# Allegro board RK_NVR_DEMO_RK3568_DDR4P216SD4_V12_20201221YWQ_final.brd
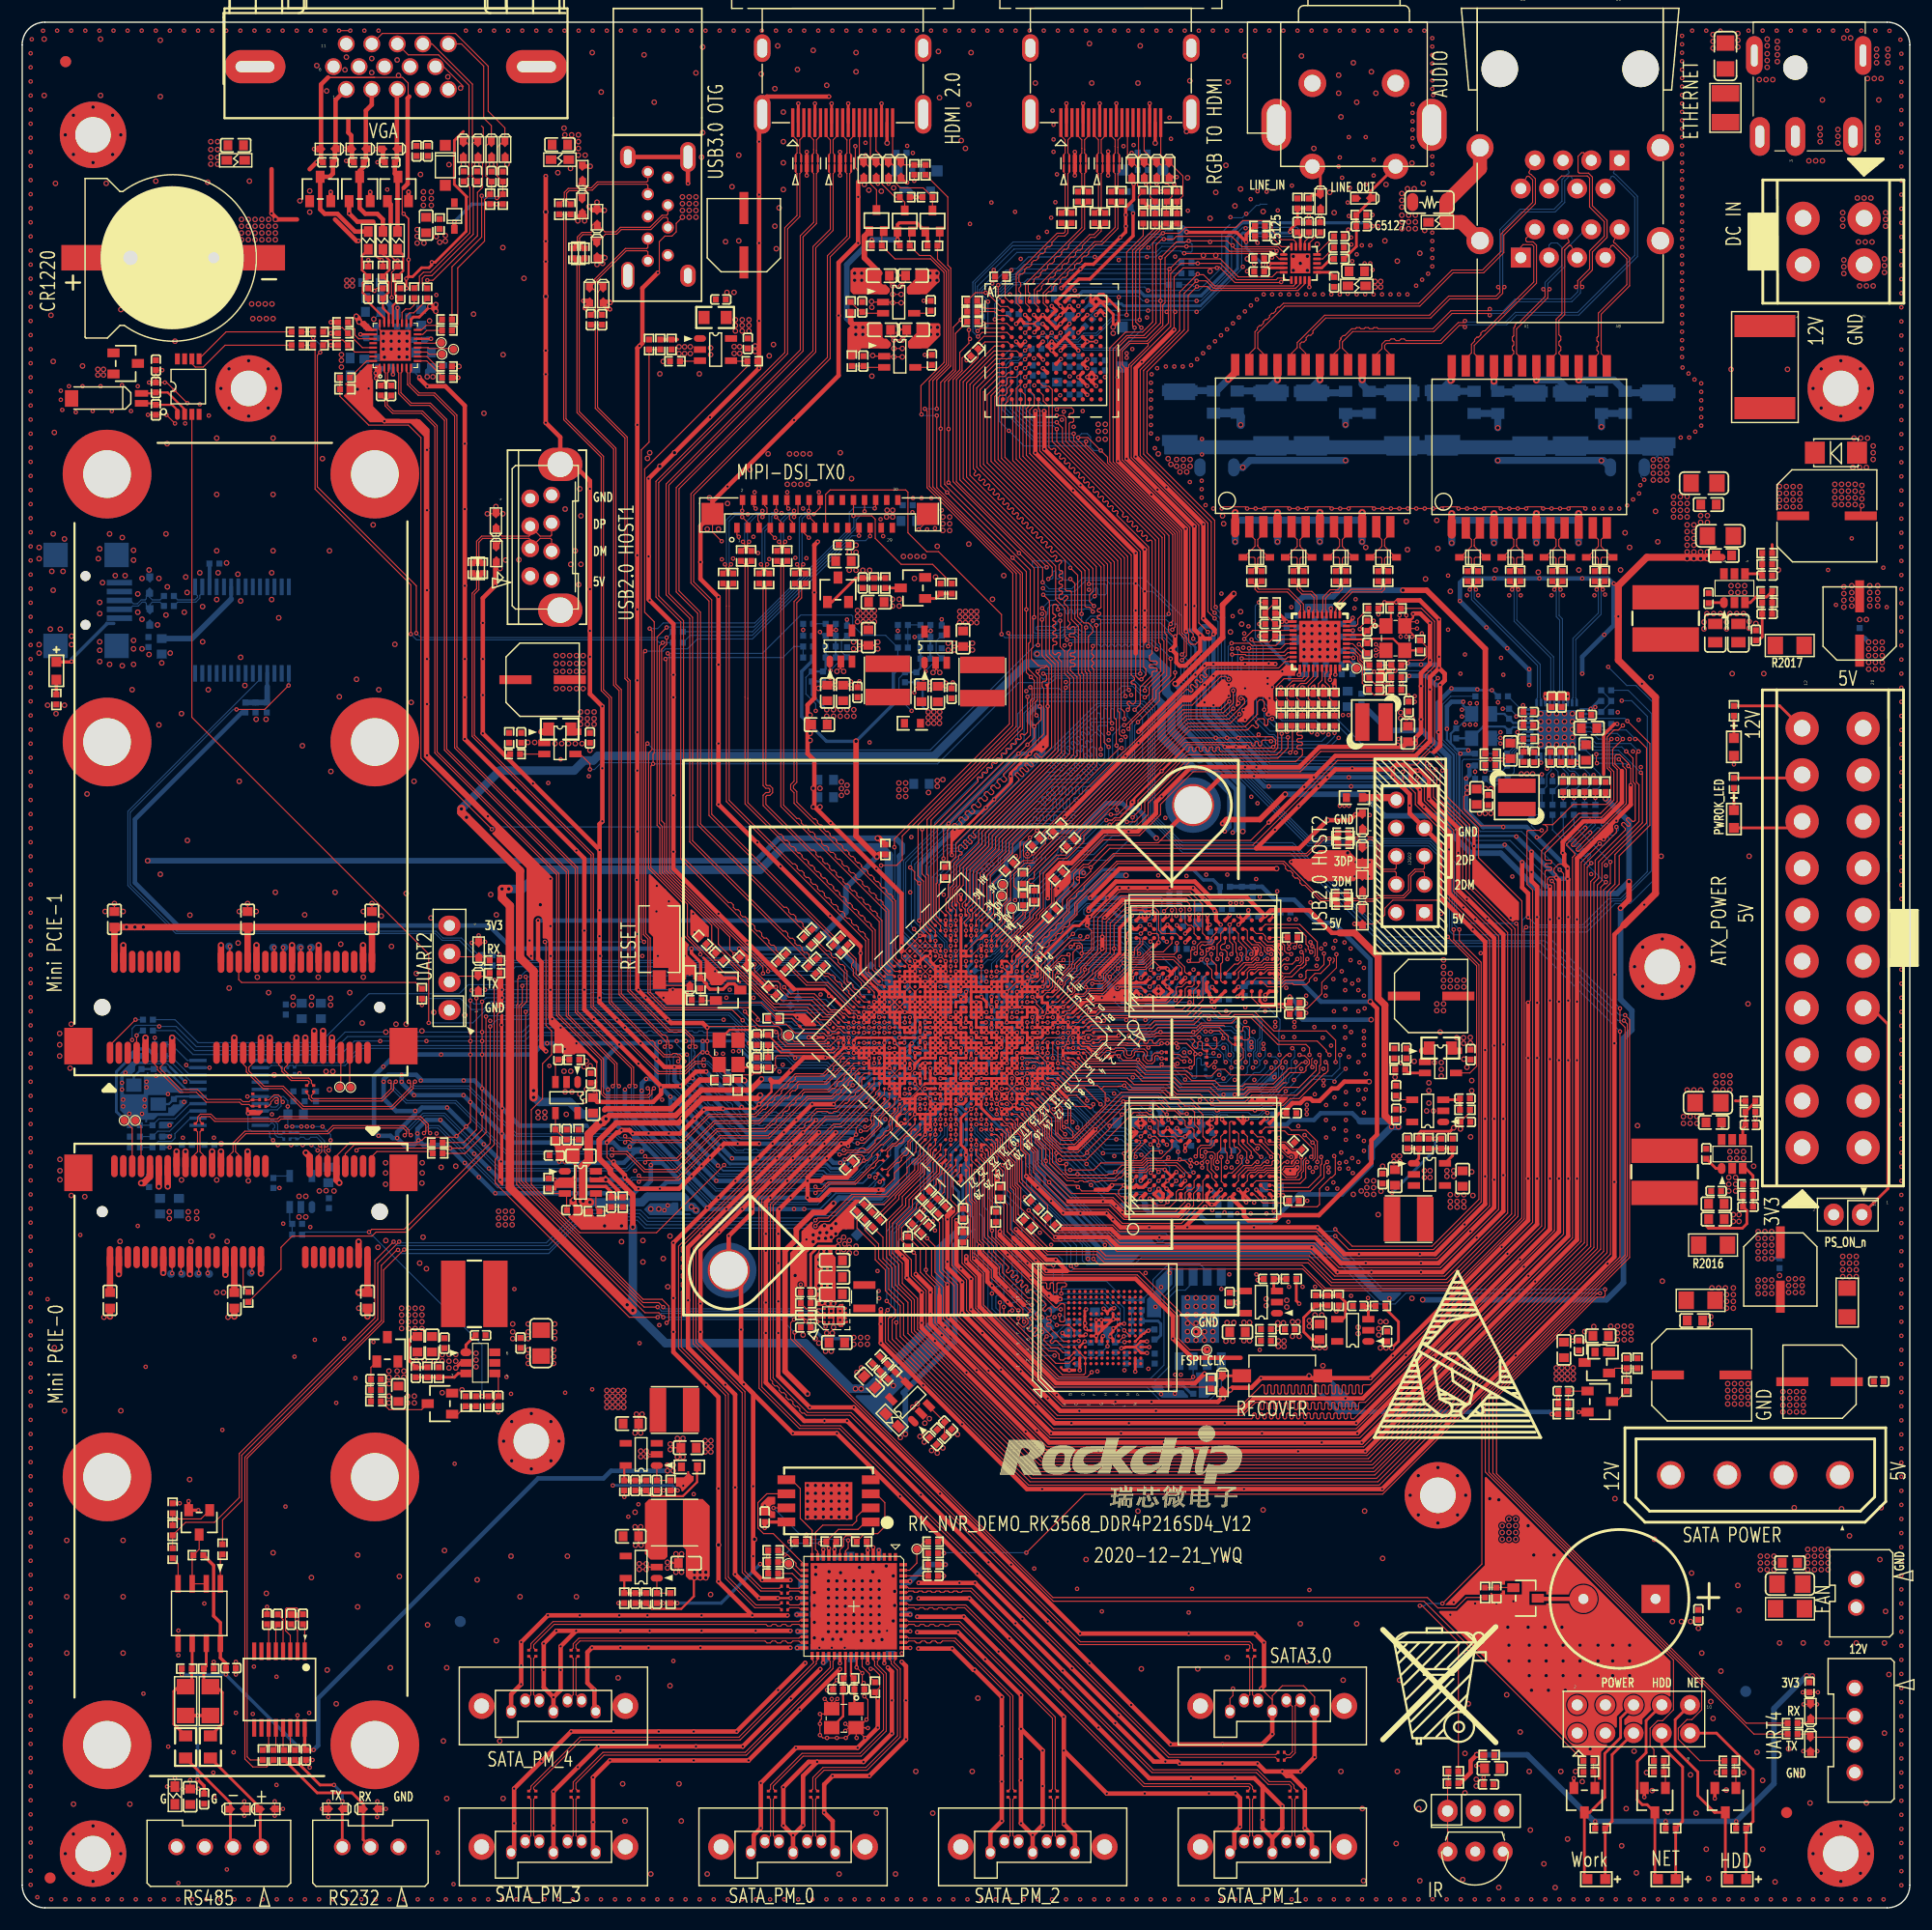
[diagram p0: board, top side]
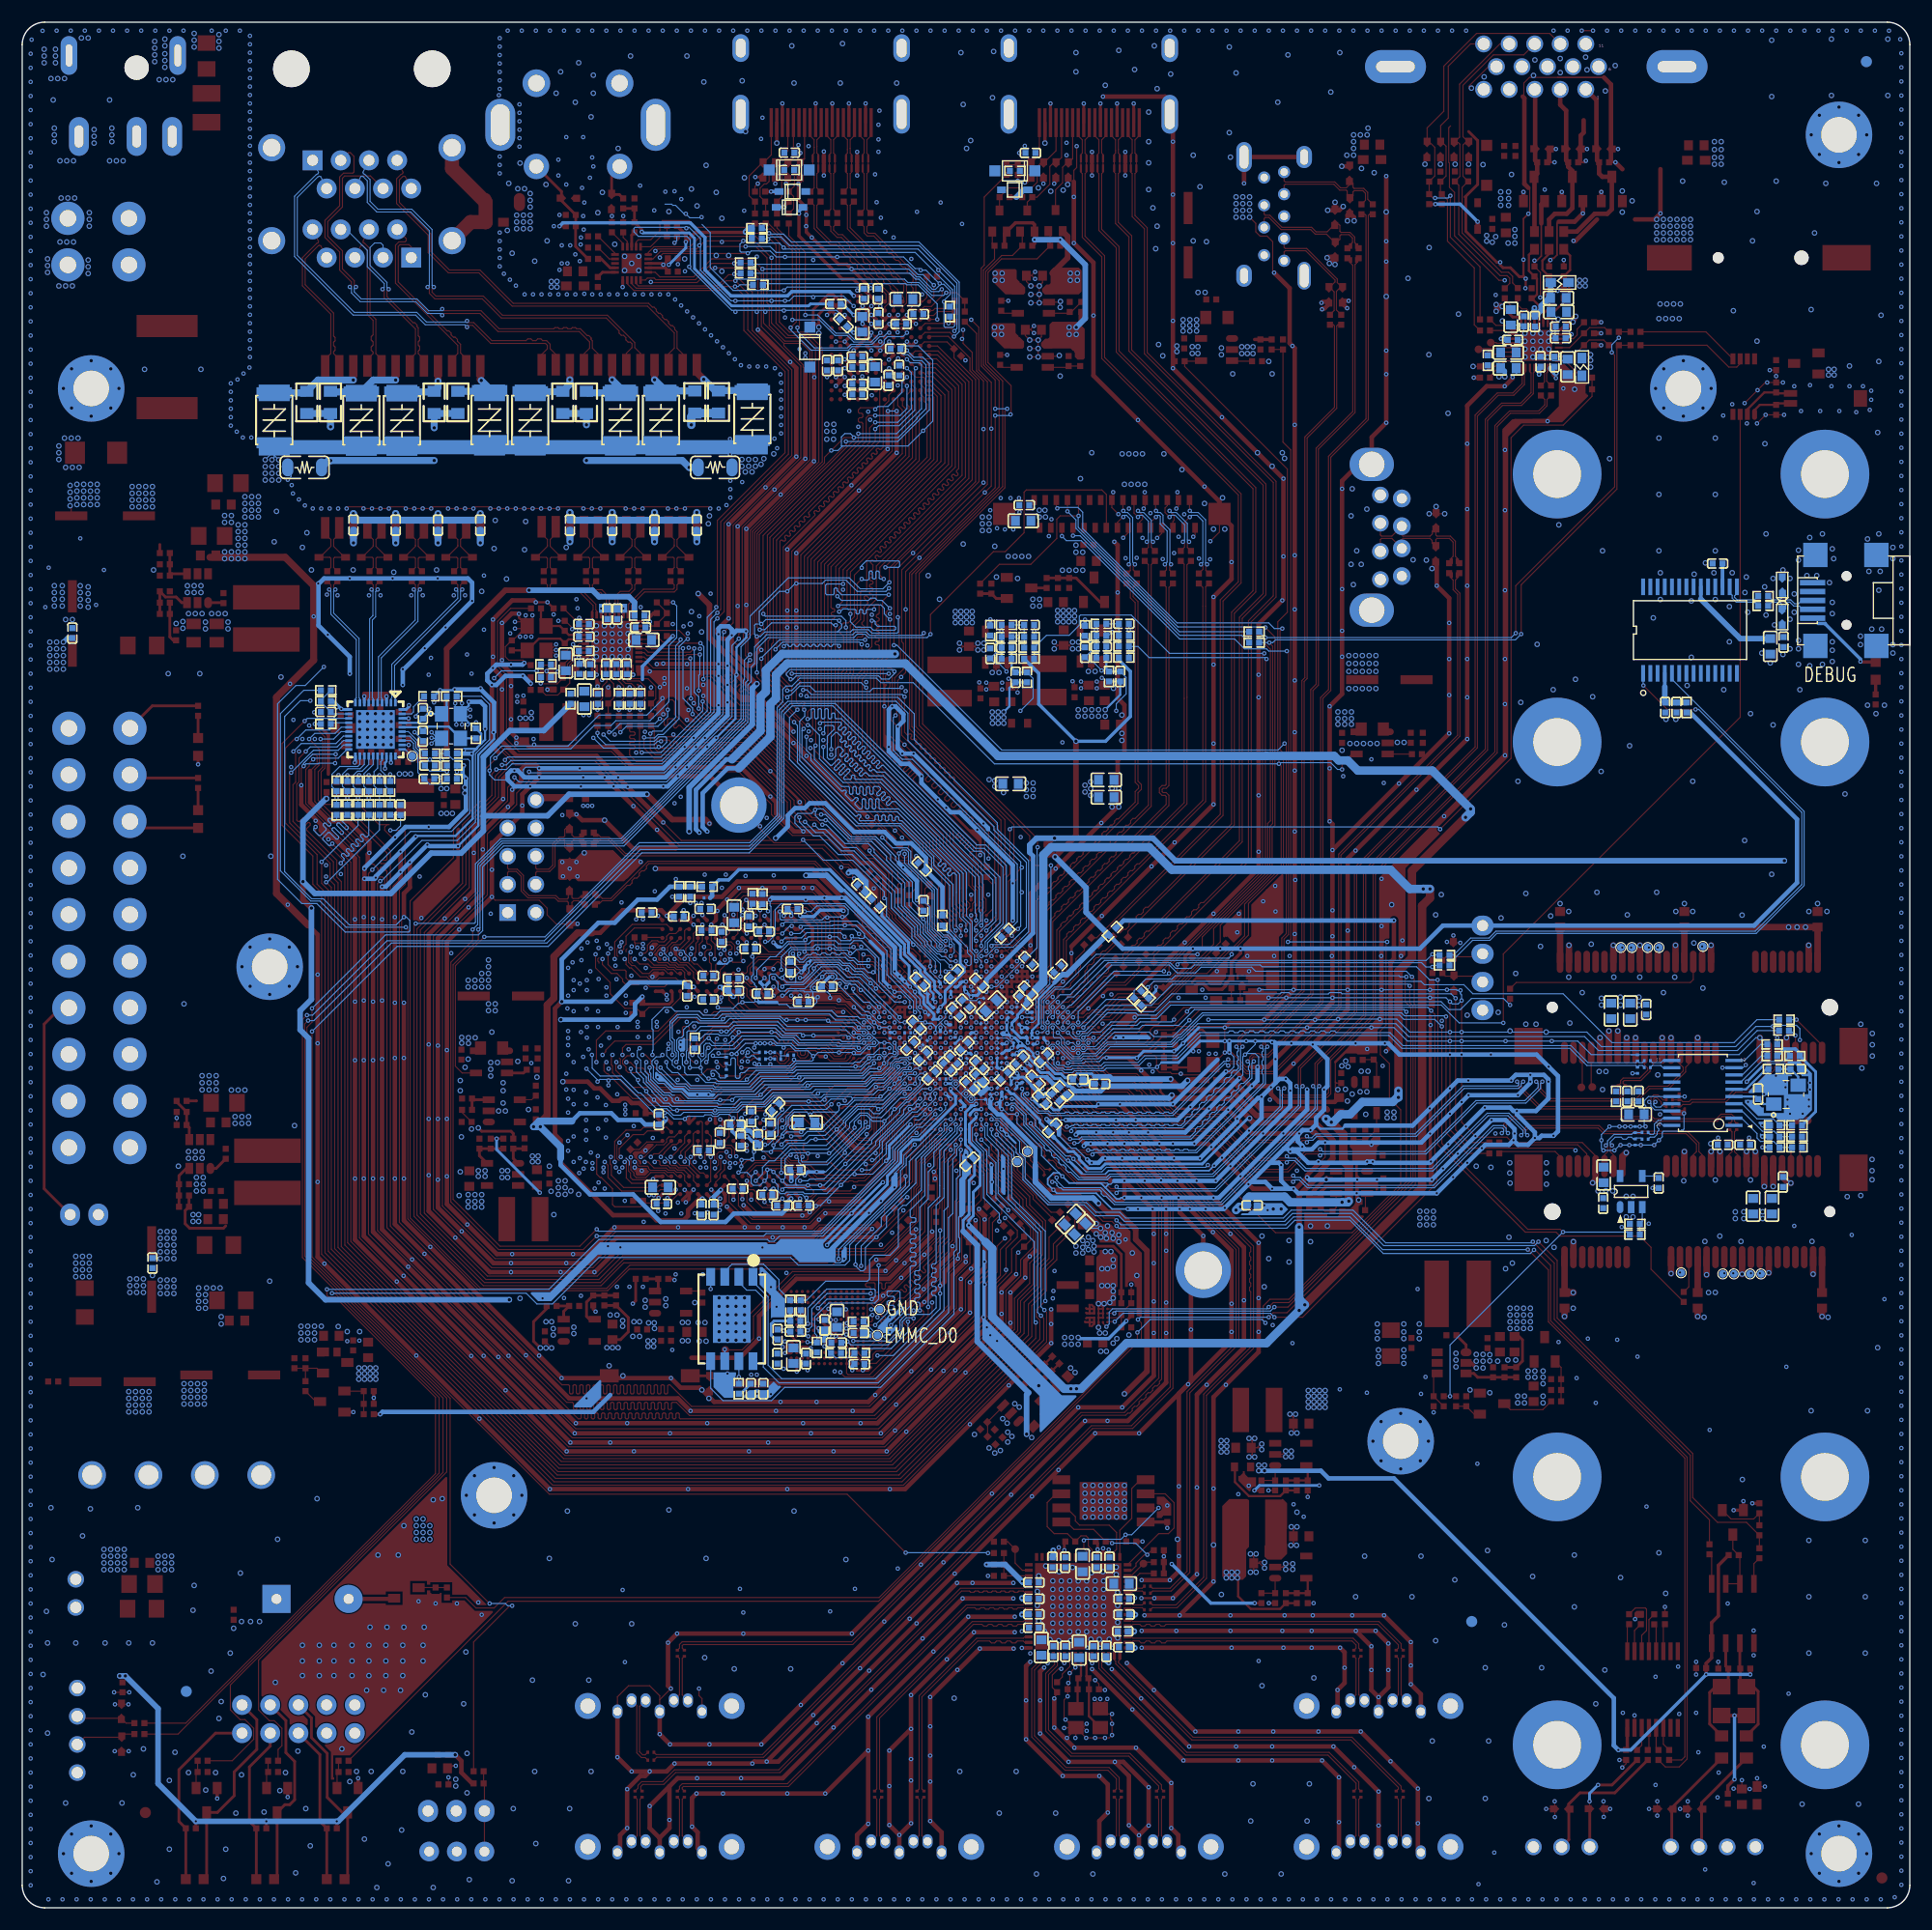
[diagram p1: board, bottom side, seen from below]

Outline 170.08 x 169.98 mm; copper layers: TOP, GND, POWER, BOTTOM. Coordinates in mm from the lower left corner of the outline.
Outline path: 0,167.94 0,2.03 arc(0.6,0.6) 2.03,0 168.05,0 arc(169.48,0.6) 170.08,2.03 170.08,167.94 arc(169.48,169.38) 168.05,169.98 2.03,169.98 arc(0.6,169.38) 0,167.94

## Design rules (mm)
net group CLK0N: nets CLK0N CLK_0N
net group CLK0P: nets CLK0P CLK_0P
net group CLK1N: nets CLK1N CLK_1N
net group CLK1P: nets CLK1P CLK_1P
net group CLK3: nets CLK3N CLK3P
net group DDR4_BG1: nets DDR4_BG1 DDR4_BG1/VSS
net group DEBUG0_USBDM: nets DEBUG0_USB_DM DEBUG0_USBDM
net group DEBUG0_USBDP: nets DEBUG0_USB_DP DEBUG0_USBDP
net group DP9: nets PCIE30_REFCLKN_IN PCIE30_REFCLKP_IN
net group DP_TX_AUX: nets DP_TX_AUXN DP_TX_AUXP
net group EDP_TX_AUX: nets EDP_TX_AUXN EDP_TX_AUXP
net group EDP_TXD0N: nets EDP_TX_D0N EDP_TXD0N
net group EDP_TXD0P: nets EDP_TX_D0P EDP_TXD0P
net group EDP_TXD1N: nets EDP_TX_D1N EDP_TXD1N
net group EDP_TXD1P: nets EDP_TX_D1P EDP_TXD1P
net group EMMC_CLKOUT: nets EMMC_CLKOUT EMMC_CLKOUT_SOC
net group EMMC_DATA_STROBE: nets EMMC_DATA_STROBE EMMC_DATA_STROBE_SOC
net group EMMC_RSTN: nets EMMC_RSTN EMMC_RSTN/FSPI_D2
net group ETH0_REFCLKO_25M: nets ETH0_REFCLKO_25M GPIO2_C1
net group ETH1_REFCLKO_25M_M1: nets ETH1_REFCLKO_25M_M1 GPIO4_B3_D
net group GMAC0_RXCLK: nets GMAC0_RXCLK PHY0_RXCLK/PHYAD1
net group GMAC0_RXD0: nets GMAC0_RXD0 PHY0_RXD0/RXDLY
net group GMAC0_RXD1: nets GMAC0_RXD1 PHY0_RXD1/TXDLY
net group GMAC0_RXD2: nets GMAC0_RXD2 PHY0_RXD2/PLLOFF
net group GMAC0_RXD3: nets GMAC0_RXD3 PHY0_RXD3/PHYAD0
net group GMAC0_RXDV_CRS: nets GMAC0_RXDV_CRS PHY0_RXDV/PHYAD2
net group GMAC0_TXCLK: nets GMAC0_TXCLK GPIO2_B0
net group GMAC0_TXD0: nets GMAC0_TXD0 GPIO2_B3
net group GMAC0_TXD1: nets GMAC0_TXD1 GPIO2_B4
net group GMAC0_TXD2: nets GMAC0_TXD2 GPIO2_A6
net group GMAC0_TXD3: nets GMAC0_TXD3 GPIO2_A7
net group GMAC0_TXEN: nets GMAC0_TXEN GPIO2_B5
net group GMAC1_RXCLK_M1: nets GMAC1_RXCLK_M1 PHY1_RXCLK/PHYAD1
net group GMAC1_RXD0_M1: nets GMAC1_RXD0_M1 PHY1_RXD0/RXDLY
net group GMAC1_RXD1_M1: nets GMAC1_RXD1_M1 PHY1_RXD1/TXDLY
net group GMAC1_RXD2_M1: nets GMAC1_RXD2_M1 PHY1_RXD2/PLLOFF
net group GMAC1_RXD3_M1: nets GMAC1_RXD3_M1 PHY1_RXD3/PHYAD0
net group GMAC1_RXDV_CRS_M1: nets GMAC1_RXDV_CRS_M1 PHY1_RXDV/PHYAD2
net group GMAC1_TXCLK_M1: nets GMAC1_TXCLK_M1 GPIO4_A0_D
net group GMAC1_TXD0_M1: nets GMAC1_TXD0_M1 GPIO4_A4_D
net group GMAC1_TXD1_M1: nets GMAC1_TXD1_M1 GPIO4_A5_D
net group GMAC1_TXD2_M1: nets GMAC1_TXD2_M1 GPIO3_D6_D
net group GMAC1_TXD3_M1: nets GMAC1_TXD3_M1 GPIO3_D7_D
net group GMAC1_TXEN_M1: nets GMAC1_TXEN_M1 GPIO4_A6_D
net group HDMI14_TX0N: nets HDMI14_TX0N HDMI14_TX0N_PORT
net group HDMI14_TX0P: nets HDMI14_TX0P HDMI14_TX0P_PORT
net group HDMI14_TX1N: nets HDMI14_TX1N HDMI14_TX1N_PORT
net group HDMI14_TX1P: nets HDMI14_TX1P HDMI14_TX1P_PORT
net group HDMI14_TX2N: nets HDMI14_TX2N HDMI14_TX2N_PORT
net group HDMI14_TX2P: nets HDMI14_TX2P HDMI14_TX2P_PORT
net group HDMI14_TXCLKN: nets HDMI14_TXCLKN HDMI14_TXCLKN_PORT
net group HDMI14_TXCLKP: nets HDMI14_TXCLKP HDMI14_TXCLKP_PORT
net group HDMI_TX0N: nets HDMI_TX0N HDMI_TX0N_PORT
net group HDMI_TX0P: nets HDMI_TX0P HDMI_TX0P_PORT
net group HDMI_TX1N: nets HDMI_TX1N HDMI_TX1N_PORT
net group HDMI_TX1P: nets HDMI_TX1P HDMI_TX1P_PORT
net group HDMI_TX2N: nets HDMI_TX2N HDMI_TX2N_PORT
net group HDMI_TX2P: nets HDMI_TX2P HDMI_TX2P_PORT
net group HDMI_TXCLKN: nets HDMI_TXCLKN HDMI_TXCLKN_PORT
net group HDMI_TXCLKP: nets HDMI_TXCLKP HDMI_TXCLKP_PORT
net group LAN0_A: nets LAN0_A+ LAN0_A-
net group LAN0_B: nets LAN0_B+ LAN0_B-
net group LAN0_C: nets LAN0_C+ LAN0_C-
net group LAN0_D: nets LAN0_D+ LAN0_D-
net group LAN1_A: nets LAN1_A+ LAN1_A-
net group LAN1_B: nets LAN1_B+ LAN1_B-
net group LAN1_C: nets LAN1_C+ LAN1_C-
net group LAN1_D: nets LAN1_D+ LAN1_D-
net group LCDC_CLK: nets LCDC_CLK LCDC_CLK_SOC
net group MIPI_DSI_TX0_CLKN: nets MIPI_DSI_TX0_CLKN MIPI_DSI_TX0_CLKN/LVDS_TX0_CLKN
net group MIPI_DSI_TX0_CLKP: nets MIPI_DSI_TX0_CLKP MIPI_DSI_TX0_CLKP/LVDS_TX0_CLKP
net group MIPI_DSI_TX0_D0N: nets MIPI_DSI_TX0_D0N MIPI_DSI_TX0_D0N/LVDS_TX0_D0N
net group MIPI_DSI_TX0_D0P: nets MIPI_DSI_TX0_D0P MIPI_DSI_TX0_D0P/LVDS_TX0_D0P
net group MIPI_DSI_TX0_D1N: nets MIPI_DSI_TX0_D1N MIPI_DSI_TX0_D1N/LVDS_TX0_D1N
net group MIPI_DSI_TX0_D1P: nets MIPI_DSI_TX0_D1P MIPI_DSI_TX0_D1P/LVDS_TX0_D1P
net group MIPI_DSI_TX0_D2N: nets MIPI_DSI_TX0_D2N MIPI_DSI_TX0_D2N/LVDS_TX0_D2N
net group MIPI_DSI_TX0_D2P: nets MIPI_DSI_TX0_D2P MIPI_DSI_TX0_D2P/LVDS_TX0_D2P
net group MIPI_DSI_TX0_D3N: nets MIPI_DSI_TX0_D3N MIPI_DSI_TX0_D3N/LVDS_TX0_D3N
net group MIPI_DSI_TX0_D3P: nets MIPI_DSI_TX0_D3P MIPI_DSI_TX0_D3P/LVDS_TX0_D3P
net group PCIE30_RX0: nets PCIE30_RX0N PCIE30_RX0P
net group PCIE30_RX1: nets PCIE30_RX1N PCIE30_RX1P
net group PCIE30_TX0N: nets PCIE30_TX0_N PCIE30_TX0N
net group PCIE30_TX0P: nets PCIE30_TX0_P PCIE30_TX0P
net group PCIE30_TX1N: nets PCIE30_TX1_N PCIE30_TX1N
net group PCIE30_TX1P: nets PCIE30_TX1_P PCIE30_TX1P
net group PHY0_MDI0: nets PHY0_MDI0+ PHY0_MDI0-
net group PHY0_MDI1: nets PHY0_MDI1+ PHY0_MDI1-
net group PHY0_MDI2: nets PHY0_MDI2+ PHY0_MDI2-
net group PHY0_MDI3: nets PHY0_MDI3+ PHY0_MDI3-
net group PHY0_MDI_0: nets PHY0_MDI_0+ PHY0_MDI_0-
net group PHY0_MDI_1: nets PHY0_MDI_1+ PHY0_MDI_1-
net group PHY0_MDI_2: nets PHY0_MDI_2+ PHY0_MDI_2-
net group PHY0_MDI_3: nets PHY0_MDI_3+ PHY0_MDI_3-
net group PHY1_MDI0: nets PHY1_MDI0+ PHY1_MDI0-
net group PHY1_MDI1: nets PHY1_MDI1+ PHY1_MDI1-
net group PHY1_MDI2: nets PHY1_MDI2+ PHY1_MDI2-
net group PHY1_MDI3: nets PHY1_MDI3+ PHY1_MDI3-
net group PHY1_MDI_0: nets PHY1_MDI_0+ PHY1_MDI_0-
net group PHY1_MDI_1: nets PHY1_MDI_1+ PHY1_MDI_1-
net group PHY1_MDI_2: nets PHY1_MDI_2+ PHY1_MDI_2-
net group PHY1_MDI_3: nets PHY1_MDI_3+ PHY1_MDI_3-
net group SATA1RXN: nets SATA1_RXN SATA1RXN
net group SATA1RXP: nets SATA1_RXP SATA1RXP
net group SATA1TXN: nets SATA1_TXN SATA1TXN
net group SATA1TXP: nets SATA1_TXP SATA1TXP
net group SATA2_RXN: nets SATA2_RXN SATAPM_TXN5
net group SATA2_RXP: nets SATA2_RXP SATAPM_TXP5
net group SATA2_TXN: nets SATA2_TXN SATAPM_RXN5
net group SATA2_TXP: nets SATA2_TXP SATAPM_RXP5
net group SATAPM_RXN0: nets SATAPM_RXN0 SATAPM_RXN_0
net group SATAPM_RXN1: nets SATAPM_RXN1 SATAPM_RXN_1
net group SATAPM_RXN2: nets SATAPM_RXN2 SATAPM_RXN_2
net group SATAPM_RXN3: nets SATAPM_RXN3 SATAPM_RXN_3
net group SATAPM_RXN4: nets SATAPM_RXN4 SATAPM_RXN_4
net group SATAPM_RXP0: nets SATAPM_RXP0 SATAPM_RXP_0
net group SATAPM_RXP1: nets SATAPM_RXP1 SATAPM_RXP_1
net group SATAPM_RXP2: nets SATAPM_RXP2 SATAPM_RXP_2
net group SATAPM_RXP3: nets SATAPM_RXP3 SATAPM_RXP_3
net group SATAPM_RXP4: nets SATAPM_RXP4 SATAPM_RXP_4
net group SATAPM_TXN0: nets SATAPM_TXN0 SATAPM_TXN_0
net group SATAPM_TXN1: nets SATAPM_TXN1 SATAPM_TXN_1
net group SATAPM_TXN2: nets SATAPM_TXN2 SATAPM_TXN_2
net group SATAPM_TXN3: nets SATAPM_TXN3 SATAPM_TXN_3
net group SATAPM_TXN4: nets SATAPM_TXN4 SATAPM_TXN_4
net group SATAPM_TXP0: nets SATAPM_TXP0 SATAPM_TXP_0
net group SATAPM_TXP1: nets SATAPM_TXP1 SATAPM_TXP_1
net group SATAPM_TXP2: nets SATAPM_TXP2 SATAPM_TXP_2
net group SATAPM_TXP3: nets SATAPM_TXP3 SATAPM_TXP_3
net group SATAPM_TXP4: nets SATAPM_TXP4 SATAPM_TXP_4
net group SPDIF_TX_M1: nets N21886811 SPDIF_TX_M1
net group USB2_HOST2_D: nets USB2_HOST2_DM USB2_HOST2_DP
net group USB2_HOST2D: nets USB2_HOST2DM USB2_HOST2DP
net group USB2_HOST3_D: nets USB2_HOST3_DM USB2_HOST3_DP
net group USB2_HOST3D: nets USB2_HOST3DM USB2_HOST3DP
net group USB3_HOST1DM: nets USB3_HOST1_DM USB3_HOST1DM
net group USB3_HOST1DP: nets USB3_HOST1_DP USB3_HOST1DP
net group USB3_OTG0DM: nets USB3_OTG0_DM USB3_OTG0DM
net group USB3_OTG0DP: nets USB3_OTG0_DP USB3_OTG0DP
net group USB3_OTG0SSRXN: nets USB3_OTG0_SSRXN USB3_OTG0SSRXN
net group USB3_OTG0SSRXP: nets USB3_OTG0_SSRXP USB3_OTG0SSRXP
net group USB3_OTG0SSTXN: nets USB3_OTG0_SSTXN USB3_OTG0SSTXN
net group USB3_OTG0SSTXP: nets USB3_OTG0_SSTXP USB3_OTG0SSTXP
net group DDR4_CKE: nets DDR4_CKE DDR4_CKE_A DDR4_CKE_B
net group DDR4_CLKN: nets DDR4_CLKN DDR4_CLKN_A DDR4_CLKN_B
net group DDR4_CLKP: nets DDR4_CLKP DDR4_CLKP_A DDR4_CLKP_B
net group DDR4_CS0N: nets DDR4_CS0N DDR4_CS0N_A DDR4_CS0N_B
net group DDR4_ODT0: nets DDR4_ODT0 DDR4_ODT0_A DDR4_ODT0_B
net group DDR_DATA: nets DDR4_DML_A DDR4_DML_B DDR4_DMU_A DDR4_DMU_B DDR4_DQL0_A DDR4_DQL0_B DDR4_DQL1_A DDR4_DQL1_B DDR4_DQL2_A DDR4_DQL2_B DDR4_DQL3_A DDR4_DQL3_B DDR4_DQL4_A DDR4_DQL4_B DDR4_DQL5_A DDR4_DQL5_B DDR4_DQL6_A DDR4_DQL6_B DDR4_DQL7_A DDR4_DQL7_B DDR4_DQSL_N_A DDR4_DQSL_N_B DDR4_DQSL_P_A DDR4_DQSL_P_B DDR4_DQSU_N_A DDR4_DQSU_N_B DDR4_DQSU_P_A DDR4_DQSU_P_B DDR4_DQU0_A DDR4_DQU0_B DDR4_DQU1_A DDR4_DQU1_B DDR4_DQU2_A DDR4_DQU2_B DDR4_DQU3_A DDR4_DQU3_B DDR4_DQU4_A DDR4_DQU4_B DDR4_DQU5_A DDR4_DQU5_B DDR4_DQU6_A DDR4_DQU6_B DDR4_DQU7_A DDR4_DQU7_B
net group GMAC: nets GMAC0_MDC GMAC0_MDIO GMAC0_RSTN_GPIO1_B0 GMAC1_MDC_M1 GMAC1_MDIO_M1 GMAC1_RSTN_GPIO1_B1
net group GMAC0_MCLKINOUT: nets GMAC0_MCLKINOUT GPIO2_C2 PHY0_CLKOUT125
net group GMAC1_MCLKINOUT_M1: nets GMAC1_MCLKINOUT_M1 GPIO4_C1_D PHY1_CLKOUT125

## Placement (name value [footprint] x y rotation side)
BP7000  BEEP  [BEEP_650]  147.17 27.84 180 top
C1000  100nF  [C0201]  84.76 76.76 135 bottom
C1001  22uF  [C0603]  75.64 62.08 135 bottom
C1002  4.7uF  [C0402]  84.71 74.12 225 bottom
C1003  4.7uF  [C0402]  86.73 75.83 45 bottom
C1004  22uF  [C0603]  74.75 61.19 135 bottom
C1005  100nF  [C0201]  84.43 78.61 45 bottom
C1006  4.7uF  [C0402]  85.19 77.67 315 bottom
C1007  100nF  [C0201]  86.02 78.19 270 bottom
C1009  4.7uF  [C0402]  85.94 80.72 45 bottom
C1010  22uF  [C0603]  81.03 101.32 180 bottom
C1011  10uF  [C0603]  81.03 109.42 90 top
C1012  100nF  [C0201]  83.5 79.51 225 bottom
C1013  100nF  [C0201]  83.64 81.8 135 bottom
C1014  22uF  [C0603]  82.77 81.32 135 bottom
C1017  100nF  [C0201]  82.46 75.98 225 bottom
C1018  4.7uF  [C0402]  83.83 75.98 45 bottom
C1019  22uF  [C0603]  72.4 100.11 180 bottom
C1020  10uF  [C0603]  72.4 101.67 180 bottom
C1021  4.7uF  [C0402]  86.14 76.42 45 bottom
C1022  4.7uF  [C0402]  83.83 74.82 225 bottom
C1023  4.7uF  [C0402]  85.05 81.5 45 bottom
C1100  100nF  [C0201]  90.29 78.88 0 bottom
C1101  100nF  [C0201]  88.72 77.98 135 bottom
C1102  4.7uF  [C0402]  90.05 77.71 315 bottom
C1103  4.7uF  [C0402]  88.13 75.06 315 bottom
C1104  4.7uF  [C0402]  88.91 76.79 315 bottom
C1105  4.7uF  [C0402]  89.5 79.57 45 bottom
C1200  100nF  [C0201]  70.26 79.65 45 top
C1201  18pF  [C0402]  66.19 76.2 90 top
C1202  18pF  [C0402]  66.19 78.23 270 top
C1203  100nF  [C0201]  79.3 79.07 45 bottom
C1205  100nF  [C0201]  79.2 77.62 135 bottom
C1206  1uF  [C0402]  79.88 81.84 45 bottom
C1207  100nF  [C0201]  79.81 78.7 45 bottom
C1208  4.7uF  [C0402]  94.49 91.9 45 bottom
C1209  100nF  [C0201]  86.44 79.32 270 bottom
C1210  100nF  [C0201]  78.29 78.44 180 bottom
C1211  1uF  [C0402]  89.19 83.48 225 bottom
C1212  100nF  [C0201]  87.35 78.7 270 bottom
C1213  100nF  [C0201]  82 78.59 315 bottom
C1214  1uF  [C0402]  74.96 74.68 180 bottom
C1300  100nF  [C0201]  85.75 72.95 225 bottom
C1301  100nF  [C0201]  83.06 73.53 45 bottom
C1400  100nF  [C0402]  74.52 66.95 225 top
C1401  100nF  [C0201]  83.49 73.08 45 bottom
C1402  100nF  [C0201]  80.77 74.02 225 bottom
C1403  100nF  [C0201]  81.62 76.83 45 bottom
C1404  100nF  [C0201]  88.21 80.29 45 bottom
C1405  100nF  [C0201]  87.76 80.95 45 bottom
C1406  100nF  [C0201]  87.65 83.29 135 bottom
C1407  100nF  [C0201]  80.14 74.6 225 bottom
C1408  100nF  [C0201]  82.04 76.4 45 bottom
C1409  4.7uF  [C0402]  80.21 76.38 135 bottom
C1410  4.7uF  [C0402]  78.18 72.85 225 bottom
C1411  100nF  [C0201]  79.4 75.69 135 bottom
C1412  100nF  [C0201]  81.04 77.09 45 bottom
C1413  4.7uF  [C0402]  73 74.27 0 bottom
C1414  4.7uF  [C0402]  78.77 74.63 225 bottom
C1415  1uF  [C0402]  89.03 93.88 45 bottom
C1500  1nF  [C0402]  84.79 62.57 270 top
C1508  100nF  [C0201]  84.47 71.29 45 bottom
C1510  100nF  [C0201]  84.86 72.26 0 bottom
C1511  1uF  [C0402]  84.71 67.26 315 bottom
C1517  100nF  [C0201]  84.2 82.47 45 bottom
C1604  100nF  [C0201]  86.21 82.8 135 bottom
C1605  1uF  [C0402]  86.13 84.18 135 bottom
C1700  100nF  [C0201]  80.44 79.83 225 bottom
C1701  100nF  [C0201]  81.04 80.45 135 bottom
C1708  100nF  [C0201]  77.8 65.86 225 top
C1709  100nF  [C0201]  77.77 67.56 225 top
C1710  100nF  [C0201]  77.27 68.07 225 top
C1712  100nF  [C0201]  77.29 66.37 225 top
C1716  100nF  [C0402]  76.78 84.63 135 bottom
C1717  100nF  [C0201]  81.25 73.28 315 bottom
C1718  100nF  [C0201]  82.01 73.72 225 bottom
C1719  1uF  [C0402]  77.27 70.31 135 bottom
C1720  1uF  [C0402]  59.26 63.32 180 bottom
C1721  100nF  [C0201]  80.26 81 45 bottom
C1722  100nF  [C0201]  80.56 77.76 45 bottom
C1723  4.7uF  [C0402]  78.03 76.63 135 bottom
C1724  4.7uF  [C0402]  79.45 82.65 45 bottom
C1800  100nF  [C0201]  85.37 83.21 45 bottom
C1801  1uF  [C0402]  83.85 83.38 45 bottom
C1900  100nF  [C0201]  87.13 74.71 0 bottom
C2000  100uF  [E_E7]  162.61 125.48 0 top
C2001  10uF  [C1206]  151.54 128.42 180 top
C2002  100nF  [C0603]  151.94 126.49 180 top
C2003  2.2uF  [C1206]  153.47 166.93 90 top
C2004  100nF  [C0402]  151.74 67.97 90 top
C2005  10uF  [C1206]  151.89 72.57 180 top
C2006  100nF  [C0603]  152.41 70.8 180 top
C2007  22pF  [C0402]  155.5 63.2 0 top
C2008  120uF  [E_C6]  158.41 57.54 180 top
C2009  22uF  [C0603]  152.65 63.45 0 top
C2010  100nF  [C0402]  152.63 64.62 0 top
C2011  100nF  [C0402]  155.71 70.57 0 top
C2012  100nF  [C0402]  151.94 118.06 90 top
C2013  10uF  [C1206]  153.01 123.67 180 top
C2014  100nF  [C0603]  153.33 121.9 180 top
C2015  22pF  [C0402]  157.23 116.64 0 top
C2016  120uF  [E_C6]  165.56 115.77 0 top
C2017  22uF  [C0805]  154.64 114.91 90 top
C2018  100nF  [C0402]  156.21 114.71 90 top
C2019  100nF  [C0402]  157.23 120.09 0 top
C2020  10uF  [C1206]  159.28 29.19 0 top
C2021  100nF  [C0603]  159.28 31.1 0 top
C2022  22uF  [C0603]  152.65 62.08 0 top
C2023  100nF  [C0402]  158.34 58.12 270 bottom
C2024  22uF  [C0805]  152.55 114.91 90 top
C2025  100nF  [C0402]  165.56 114.91 90 bottom
C2027  120uF  [E_C6]  161.94 47.42 90 top
C2028  100nF  [C0402]  167.28 47.45 0 top
C2029  100uF  [E_E7]  151.33 48.03 0 top
C2030  100nF  [C0603]  150.72 52.93 0 top
C2100  10uF  [C0603]  50.35 67.77 180 top
C2101  1uF  [C0402]  47.95 67.81 0 top
C2102  22pF  [C0402]  53.06 63.61 270 top
C2103  10uF  [C0603]  129.79 65.74 90 top
C2104  100pF  [C0402]  127.86 68.88 270 top
C2105  DNP  [C0402]  49.53 62.89 0 top
C2106  22uF  [C0603]  123.7 65.84 90 top
C2107  100nF  [C0402]  122.58 65.74 90 top
C2108  100nF  [C0402]  124.81 68.91 90 top
C2109  10uF  [C0603]  84.77 114.4 270 top
C2110  100nF  [C0402]  80.57 110.92 270 bottom
C2111  22uF  [C0603]  82.5 109.41 90 top
C2112  100nF  [C0402]  83.74 109.47 90 top
C2113  10uF  [C0603]  76.24 114.5 270 top
C2114  100nF  [C0402]  71.15 111 90 bottom
C2115  22uF  [C0603]  73.96 109.51 90 top
C2116  100nF  [C0402]  75.26 109.58 90 top
C2117  DNP  [C0402]  82.85 113.08 90 bottom
C2118  DNP  [C0402]  74.31 113.18 90 bottom
C2120  100pF  [C0402]  81.38 113.59 0 bottom
C2122  100pF  [C0402]  72.85 113.7 0 bottom
C2123  10nF  [C0402]  79.35 115.64 180 bottom
C2124  10nF  [C0402]  70.81 115.74 180 bottom
C2125  22uF  [C0603]  73.4 50.96 180 top
C2126  100nF  [C0402]  70.6 55.48 180 top
C2127  22uF  [C0603]  73.2 58.37 180 top
C2128  22uF  [C0603]  73.2 55.32 180 top
C2129  22uF  [C0603]  73.2 56.84 180 top
C2130  10uF  [C0603]  142.23 51.56 180 top
C2131  100nF  [C0402]  144.55 49.09 270 top
C2132  10uF  [C0603]  138.91 50.29 90 top
C2133  100nF  [C0402]  140.26 50.7 90 top
C2134  100nF  [C0402]  70.6 52.32 180 top
C2135  1uF  [C0402]  122.99 51.51 90 top
C2136  DNP  [C0402]  117.62 54.75 90 top
C2137  10uF  [C0603]  116.89 51.92 90 top
C2138  1uF  [C0402]  82.07 42.08 315 top
C2139  DNP  [C0402]  77.64 48.69 45 top
C2140  10uF  [C0603]  76.36 47.4 135 top
C2141  100nF  [C0402]  120.35 54.25 180 top
C2142  100nF  [C0402]  83.43 43.46 315 top
C2145  100nF  [C0402]  138.85 46.57 180 top
C2150  22uF  [C0603]  71.83 106.65 180 top
C2151  22uF  [C0603]  72.54 109.51 90 top
C2200  12pF  [C0402]  12.04 135.03 270 top
C2201  DNP  [C0402]  12.04 137.05 90 top
C2202  100nF  [C0402]  12.04 139.06 270 top
C2203  1uF  [C0402]  51.23 74.79 270 top
C2204  22pF  [C0402]  49.06 69.7 270 top
C2205  10uF  [C0603]  51.43 72.34 90 top
C2206  DNP  [C0402]  48.31 76.91 90 top
C2300  1uF  [C0402]  114.22 52.14 0 top
C2301  4.7uF  [C0603]  109.5 51.92 180 top
C2302  DNP  [C0402]  112.32 56.69 180 top
C2303  DNP  [C0402]  108.79 55.01 270 top
C2500  100nF  [C0402]  51.23 143.15 90 top
C2501  100nF  [C0402]  52.25 143.15 90 top
C2502  1uF  [C0402]  65.38 141.02 270 top
C2503  120uF  [E_C6]  65.02 150.77 0 top
C2504  100nF  [C0402]  62.94 144.98 0 top
C2505  1uF  [C0402]  51.16 105.46 270 top
C2506  100nF  [C0402]  44.96 105.47 270 top
C2507  120uF  [E_C6]  46.89 110.71 270 top
C2510  1uF  [C0402]  130.51 76.91 270 top
C2511  120uF  [E_C6]  126.95 82.19 270 top
C2512  100nF  [C0402]  124.72 77.02 270 top
C3300  100pF  [C0201]  100.84 76.86 180 bottom
C3301  1nF  [C0402]  114.58 63.74 0 top
C3302  1nF  [C0402]  114.66 80.57 0 top
C3303  1nF  [C0201]  108.37 91.04 180 bottom
C3304  1nF  [C0201]  88.23 82.14 45 bottom
C3305  1nF  [C0402]  108.86 62.94 270 bottom
C3306  1nF  [C0402]  110.16 82.65 270 bottom
C3307  10uF  [C0603]  112.57 64.95 0 bottom
C3308  10uF  [C0603]  99.35 70.79 180 bottom
C3309  10uF  [C0603]  105.94 89.5 90 bottom
C3310  1uF  [C0402]  107.78 62.93 270 bottom
C3311  100nF  [C0402]  112.47 63.45 0 bottom
C3312  100nF  [C0402]  99.68 63.31 180 bottom
C3313  100nF  [C0402]  114.66 81.58 0 top
C3314  100nF  [C0402]  108.28 81.89 0 bottom
C3315  100nF  [C0402]  100.67 90.04 180 bottom
C3316  100nF  [C0402]  103.38 82.41 0 bottom
C3317  100nF  [C0402]  105.34 69.15 90 bottom
C3318  100nF  [C0402]  108.54 90.05 180 bottom
C3319  100nF  [C0402]  106 82.67 0 bottom
C3320  100nF  [C0402]  104.48 86.44 180 bottom
C3321  100nF  [C0402]  104.59 88.92 90 bottom
C3322  1uF  [C0402]  130.03 70.84 0 top
C3323  4.7uF  [C0402]  123.8 71.53 90 top
C3325  100nF  [C0402]  97.57 83.05 180 bottom
C3326  100nF  [C0402]  110.92 89.37 180 bottom
C3327  100nF  [C0402]  101.62 63.31 0 bottom
C3328  100nF  [C0402]  112.72 71.06 90 bottom
C3329  100nF  [C0402]  130 72.95 0 top
C3330  DNP  [C0402]  123.8 73.66 90 top
C3331  1uF  [C0402]  107.05 87.53 270 bottom
C3332  100nF  [C0402]  107.23 69.4 270 bottom
C3333  100nF  [C0402]  105.87 70.59 0 bottom
C3334  100nF  [C0402]  100.46 66.52 180 bottom
C3335  100nF  [C0402]  108.25 84.02 0 bottom
C3336  100nF  [C0402]  103.23 88 180 bottom
C3337  100nF  [C0402]  106 83.77 0 bottom
C3338  100nF  [C0402]  99.68 81.68 180 bottom
C3339  100nF  [C0402]  114.35 71.63 0 top
C3340  100nF  [C0402]  100.85 84.82 90 bottom
C3341  100nF  [C0402]  102.94 64.27 0 bottom
C3342  100nF  [C0402]  113.81 89.72 0 bottom
C3343  100nF  [C0402]  102.22 72.2 135 bottom
C3344  100nF  [C0402]  103.78 69.23 270 bottom
C3345  100nF  [C0402]  105.61 64.82 0 bottom
C4000  100nF  [C0402]  100.41 51.94 0 bottom
C4001  100nF  [C0402]  99.45 49.51 270 bottom
C4002  100nF  [C0402]  102.04 49.51 270 bottom
C4003  100nF  [C0402]  102.02 51.68 90 bottom
C4004  100nF  [C0402]  94.72 51.82 180 bottom
C4005  4.7uF  [C0603]  100.58 49.77 270 bottom
C4006  100nF  [C0402]  96.72 50.95 180 bottom
C4007  100nF  [C0402]  97.78 52.54 270 bottom
C4008  4.7uF  [C0603]  96.66 53.03 90 bottom
C4009  2.2uF  [C0402]  94.64 49.01 180 bottom
C4304  100nF  [C0402]  104.43 46.79 270 bottom
C4305  1uF  [C0402]  103.3 46.79 270 bottom
C5000  1uF  [C0402]  79.23 158.19 0 bottom
C5100  100nF  [C0402]  85.8 140.21 225 top
C5101  1uF  [C0402]  90.88 142.77 180 bottom
C5102  100nF  [C0402]  96.09 142.88 45 bottom
C5103  1uF  [C0402]  92.93 143.3 270 bottom
C5104  100nF  [C0402]  92.98 145.5 90 bottom
C5105  1uF  [C0402]  94.83 137.37 180 bottom
C5106  100nF  [C0402]  94.83 138.91 0 bottom
C5107  1uF  [C0402]  94.23 145.5 90 bottom
C5108  100nF  [C0402]  97.55 139.04 270 bottom
C5109  4.7uF  [C0603]  77.44 147.12 0 top
C5110  4.7uF  [C0603]  80.29 147.12 180 top
C5111  1uF  [C0402]  96.57 139.04 270 bottom
C5112  100nF  [C0402]  91.06 138.58 270 bottom
C5113  100nF  [C0402]  92.02 137.69 270 bottom
C5114  100nF  [C0402]  75.69 144.31 90 top
C5115  DNP  [C0402]  81.86 144.41 90 top
C5116  4.7uF  [C0603]  80.39 142.25 180 top
C5117  4.7uF  [C0603]  93.25 138.23 270 bottom
C5118  100nF  [C0402]  91.39 140.54 180 bottom
C5119  4.7uF  [C0603]  77.54 142.25 0 top
C5120  100nF  [C0402]  94.83 136.42 180 bottom
C5121  100nF  [C0402]  94.83 139.85 0 bottom
C5122  100nF  [C0402]  75.79 139.43 90 top
C5123  DNP  [C0402]  81.97 139.54 90 top
C5125  1uF  [C0402]  96.77 144.58 0 bottom
C5126  1uF  [C0402]  100.95 158.22 180 bottom
C5127  1uF  [C0402]  120.65 151.59 180 top
C5128  4.7uF  [C0603]  94.39 142.75 270 bottom
C5129  4.7uF  [C0603]  90.53 145.01 180 bottom
C5130  100nF  [C0402]  89.33 143.66 180 bottom
C5200  10uF  [C0603]  76.96 117.7 0 top
C5201  100nF  [C0402]  75.74 119.42 90 top
C5203  100nF  [C0402]  79.79 126.44 0 bottom
C5204  10uF  [C0603]  79.89 125.02 0 bottom
C5205  10uF  [C0603]  74 121.41 0 top
C5206  100nF  [C0402]  74.02 122.86 0 top
C5900  100nF  [C0402]  31.47 141.49 0 bottom
C5901  4.7uF  [C0603]  31.62 143.87 0 bottom
C5902  100nF  [C0402]  31.45 142.54 0 bottom
C5903  2pF  [C0402]  31.18 145.55 90 top
C5904  2pF  [C0402]  27.55 157.35 180 top
C5905  2pF  [C0402]  32.5 145.55 90 top
C5906  2pF  [C0402]  30.33 157.35 180 top
C5907  100nF  [C0402]  32.33 136.78 90 top
C5908  100nF  [C0402]  33.24 136.77 90 top
C5909  100nF  [C0402]  34.78 143.01 270 bottom
C5910  4.7uF  [C0603]  35.95 143.37 270 bottom
C5911  2pF  [C0402]  34.07 145.55 90 top
C5912  2pF  [C0402]  33.12 157.35 180 top
C5913  100nF  [C0402]  33.28 139.37 90 bottom
C5914  2pF  [C0402]  39.79 156.07 90 top
C5915  18pF  [C0402]  43.31 156.06 90 top
C5916  18pF  [C0402]  42.29 156.06 90 top
C5917  4.7uF  [C0603]  36.4 151.69 270 top
C5918  100nF  [C0402]  35.78 141.34 180 bottom
C5919  2pF  [C0402]  40.99 156.07 90 top
C5920  10uF  [C0603]  36.17 138.79 180 bottom
C5921  4.7uF  [C0603]  36.17 140.21 180 bottom
C5922  4.7uF  [C0603]  31.66 145.11 180 bottom
C5923  100nF  [C0402]  33.78 143 270 bottom
C5924  100nF  [C0603]  48.45 158.94 0 top
C5925  100nF  [C0603]  19.24 158.88 180 top
C5926  4.7uF  [C0603]  30.83 138.9 90 bottom
C5927  100nF  [C0402]  32.01 139.37 90 bottom
C5928  1uF  [C0402]  35.54 158.37 270 top
C5929  100nF  [C0402]  36.54 158.37 270 top
C6700  18pF  [C0402]  133.98 107.64 90 bottom
C6701  18pF  [C0402]  133.98 105.62 270 bottom
C6703  DNP  [C0402]  79.81 60.05 270 top
C6704  1000pF  [C1206L]  144.63 129.84 0 bottom
C6705  100pF  [C0402]  133.34 102.97 180 bottom
C6706  100pF  [C0402]  133.39 101.76 180 bottom
C6707  4.7uF  [C0603]  140.89 104.14 90 top
C6708  1uF  [C0402]  138.64 103.74 90 top
C6709  100nF  [C0402]  137.7 103.74 90 top
C6710  100nF  [C0402]  136.24 103.72 90 top
C6711  100nF  [C0402]  140.93 107.53 180 top
C6712  4.7uF  [C0603]  131.05 100.15 90 top
C6713  100nF  [C0402]  138.7 108.7 270 top
C6714  100nF  [C0402]  132.09 99.86 90 top
C6715  4.7uF  [C0603]  134.09 104.29 90 top
C6716  100nF  [C0402]  142.72 107.8 0 bottom
C6717  4.7uF  [C0603]  141.18 106.34 180 top
C6718  100nF  [C0402]  135.7 107.8 0 top
C6719  100nF  [C0402]  137.81 108.7 270 top
C6720  100nF  [C0402]  139.53 103.74 90 top
C6721  100nF  [C0402]  135.7 106.61 0 top
C6722  DNP  [C0402]  135.99 98.96 90 bottom
C6725  10nF  [C0402]  140.23 124.64 270 bottom
C6726  10nF  [C0402]  132.61 124.64 270 bottom
C6727  10nF  [C0402]  128.8 124.64 270 bottom
C6728  10nF  [C0402]  136.42 124.64 270 bottom
C6729  1000pF  [C1206L]  126.8 153.76 180 top
C6800  18pF  [C0402]  121.19 115.56 90 top
C6801  18pF  [C0402]  121.19 113.54 270 top
C6803  DNP  [C0402]  123.81 112.02 0 top
C6804  1000pF  [C1206L]  107.65 129.84 180 bottom
C6805  100pF  [C0402]  121.83 110.89 0 top
C6806  100pF  [C0402]  121.78 109.82 0 top
C6807  4.7uF  [C0603]  119.43 108.97 270 bottom
C6808  1uF  [C0402]  116.53 111.66 90 bottom
C6809  100nF  [C0402]  117.47 111.66 90 bottom
C6810  100nF  [C0402]  117.36 116.62 270 bottom
C6811  100nF  [C0402]  118.9 111.65 90 bottom
C6812  4.7uF  [C0603]  114.07 114.29 0 bottom
C6813  100nF  [C0402]  114.37 115.42 0 bottom
C6814  4.7uF  [C0603]  124.85 105.81 270 top
C6815  100nF  [C0402]  116.46 116.62 270 bottom
C6816  100nF  [C0402]  112.45 115.73 180 top
C6817  4.7uF  [C0603]  121.1 112.21 90 bottom
C6818  100nF  [C0402]  119.47 115.72 180 bottom
C6819  100nF  [C0402]  115.61 111.66 90 bottom
C6820  100nF  [C0402]  124.93 108.29 90 top
C6821  100nF  [C0402]  119.47 114.59 180 bottom
C6822  DNP  [C0402]  88.87 90.33 90 bottom
C6825  10nF  [C0402]  109.3 124.64 270 bottom
C6826  10nF  [C0402]  116.92 124.64 270 bottom
C6827  10nF  [C0402]  120.73 124.64 270 bottom
C6828  10nF  [C0402]  113.11 124.64 270 bottom
C7000  1uF  [C0402]  114.91 151.49 90 top
C7001  1uF  [C0402]  115.93 151.49 90 top
C7002  1uF  [C0402]  116.94 151.49 90 top
C7003  1uF  [C0402]  118.64 150.67 0 top
C7004  1uF  [C0402]  118.64 149.66 0 top
C7005  1uF  [C0402]  118.64 148.64 0 top
C7006  1uF  [C0402]  111.46 147.5 180 top
C7007  100nF  [C0402]  111.46 148.69 180 top
C7008  100nF  [C0402]  118.21 146.56 270 top
C7009  4.7uF  [C0603]  120.25 147.52 0 top
C7010  100nF  [C0402]  151.03 26.42 270 top
C8300  10nF  [C0201]  113.44 13.31 0 top
C8301  10nF  [C0201]  113.44 14.02 0 top
C8302  10nF  [C0201]  111.05 22.95 270 top
C8303  10nF  [C0201]  110.42 22.95 270 top
C8304  10nF  [C0201]  114.86 10.25 270 top
C8305  10nF  [C0201]  114.23 10.25 270 top
C8306  10nF  [C0201]  111.05 10.25 270 top
C8307  10nF  [C0201]  110.42 10.25 270 top
C8308  10nF  [C0201]  93.27 10.25 270 top
C8309  10nF  [C0201]  92.64 10.25 270 top
C8310  100nF  [C0402]  82.07 29.92 0 top
C8311  10nF  [C0201]  89.46 10.25 270 top
C8312  10nF  [C0201]  88.83 10.25 270 top
C8313  100nF  [C0402]  66.9 35.23 90 top
C8314  10nF  [C0201]  71.68 10.25 270 top
C8315  10nF  [C0201]  71.05 10.25 270 top
C8316  10nF  [C0201]  67.87 10.25 270 top
C8317  10nF  [C0201]  67.24 10.25 270 top
C8318  10nF  [C0201]  68.69 28.99 0 top
C8319  18pF  [C0402]  75.43 19.7 0 top
C8320  18pF  [C0402]  73.51 19.7 180 top
C8321  10nF  [C0201]  68.69 28.36 0 top
C8322  10nF  [C0201]  68.69 27.49 0 top
C8323  10nF  [C0201]  68.69 26.86 0 top
C8324  10nF  [C0201]  50.09 10.25 270 top
C8325  10nF  [C0201]  49.46 10.25 270 top
C8326  10nF  [C0201]  46.28 10.25 270 top
C8327  10nF  [C0201]  45.65 10.25 270 top
C8328  10uF  [C0603]  54.84 43.65 0 top
C8329  100pF  [C0402]  55.23 38.07 90 top
C8330  22uF  [C0603]  60.04 41.47 180 top
C8331  10uF  [C0603]  74.53 30.99 270 bottom
C8332  100nF  [C0402]  78.93 29.34 180 bottom
C8333  100nF  [C0402]  76.1 31.15 270 bottom
C8334  100nF  [C0402]  76.1 23.13 90 bottom
C8335  100nF  [C0402]  73.53 23.13 90 bottom
C8336  10uF  [C0603]  74.84 23.24 90 bottom
C8337  100nF  [C0402]  70.82 23.5 0 bottom
C8338  100nF  [C0402]  73.25 31.15 270 bottom
C8339  100nF  [C0402]  70.79 26.44 0 bottom
C8340  100nF  [C0402]  78.93 26.47 180 bottom
C8341  100nF  [C0402]  57.18 38.07 270 top
C8342  10nF  [C0201]  50.09 22.95 270 top
C8343  10nF  [C0201]  49.46 22.95 270 top
C8344  10nF  [C0201]  46.28 22.95 270 top
C8345  10nF  [C0201]  45.65 22.95 270 top
C8346  10uF  [C0603]  54.84 33.49 0 top
C8347  100pF  [C0402]  55.23 27.91 90 top
C8348  22uF  [C0603]  59.82 31.06 180 top
C8349  10uF  [C0603]  71.03 29.22 0 bottom
C8350  100nF  [C0402]  78.93 25.25 180 bottom
C8351  100nF  [C0402]  77.16 23.13 90 bottom
C8352  100nF  [C0402]  72.39 23.13 90 bottom
C8353  100nF  [C0402]  70.92 24.92 0 bottom
C8354  10uF  [C0603]  78.25 23.46 90 bottom
C8355  100nF  [C0402]  70.79 27.84 0 bottom
C8356  100nF  [C0402]  78.93 27.86 180 bottom
C8357  100nF  [C0402]  77.24 31.15 270 bottom
C8358  100nF  [C0402]  72.11 31.15 270 bottom
C8359  100nF  [C0402]  57.18 27.91 270 top
C8500  220nF  [C0201]  16.22 70.42 270 top
C8501  220nF  [C0201]  15.6 70.42 270 top
C8502  1uF  [C0402]  27.63 63.52 90 bottom
C8503  10uF  [C0603]  27.58 66.07 270 bottom
C8504  DNP  [C0402]  22.63 65.34 270 bottom
C8505  1uF  [C0402]  14.84 68.78 180 bottom
C8506  100nF  [C0402]  16.86 68.78 0 bottom
C8507  220nF  [C0201]  25.63 73.85 90 top
C8508  220nF  [C0201]  26.26 73.85 90 top
C8509  18pF  [C0402]  13.67 73.36 90 bottom
C8510  18pF  [C0402]  10.3 75.61 180 bottom
C8511  10uF  [C0603]  24.64 71.53 180 bottom
C8512  1uF  [C0402]  24.43 73.15 270 bottom
C8513  100nF  [C0402]  25.45 73.15 270 bottom
C8514  100nF  [C0402]  41.3 51.61 0 top
C8515  10uF  [C1206]  46.76 50.9 90 top
C8516  100nF  [C0402]  44.9 50.92 90 top
C8517  22pF  [C0402]  35.46 48.27 270 top
C8518  100nF  [C0402]  42.91 45.66 270 top
C8519  22uF  [C0603]  35.61 50.8 270 top
C8520  22uF  [C0603]  36.93 50.8 270 top
C8521  100nF  [C0402]  38.05 50.9 270 top
C8522  10uF  [C0603]  14.12 63.25 270 bottom
C8523  10uF  [C0603]  25.19 80.85 90 bottom
C8524  10uF  [C0603]  8.31 89.1 90 top
C8525  10uF  [C0603]  26.91 80.85 90 bottom
C8526  10uF  [C0603]  12.42 63.25 270 bottom
C8527  100nF  [C0402]  23.75 80.98 90 bottom
C8528  10uF  [C0603]  31.11 54.76 270 top
C8529  10uF  [C0603]  19.11 54.76 270 top
C8530  10uF  [C0603]  7.91 54.76 270 top
C8531  10uF  [C0603]  20.31 89.1 90 top
C8532  10uF  [C0603]  31.51 89.1 90 top
C8533  100nF  [C0402]  11.43 65.43 90 bottom
C9000  1nF  [C0402]  79.39 85.33 225 bottom
C9001  100nF  [C0402]  132.12 11.12 180 top
C9002  10uF  [C0603]  132.46 12.57 180 top
C9100  1uF  [C0402]  21.02 108.2 270 bottom
C9101  100nF  [C0402]  22.04 108.2 270 bottom
C9102  10uF  [C0603]  12.57 113.71 270 bottom
C9103  100nF  [C0402]  11.37 114.1 270 bottom
C9104  100nF  [C0402]  17.32 121.18 0 bottom
C9500  100nF  [C0402]  161.05 19.88 270 top
C9501  100nF  [C0402]  18.8 21.61 0 top
C9502  4.7nF  [C0402]  16.4 9.83 270 top
C9503  100nF  [C0603]  15.13 10.01 90 top
C9504  100nF  [C0402]  25.29 26.02 270 top
C9505  100nF  [C0402]  25.56 13.78 270 top
C9506  100nF  [C0402]  24.24 26.02 270 top
C9507  100nF  [C0402]  23.03 26 90 top
C9508  100nF  [C0402]  22.06 26.02 270 top
C9516  100nF  [C0402]  31.87 47.66 180 top
C9517  10uF  [C0603]  33.9 46.34 270 top
D1201  ESD5451N  [ESD0402]  60.14 83.78 90 top
D1500  ESD5451N  [ESD0402]  108.15 47.24 270 top
D2000  SS32  [DO_214AC]  163.42 131.17 0 top
D2200  BAT54C  [SOT_23]  9.32 139.22 270 top
D2500  ESD5341N  [ESD0402]  51.79 152.4 90 top
D2501  ESD5311X  [ESD0402]  50.47 153.42 270 top
D2502  ESD5311X  [ESD0402]  50.47 156.36 90 top
D2504  ESD5341N  [ESD0402]  51.79 149.45 270 top
D2505  ESD5311X  [ESD0402]  51.13 145.39 270 top
D2506  ESD5311X  [ESD0402]  52.35 145.39 270 top
D2507  ESD5341N  [ESD0402]  42.68 125.04 90 top
D2510  ESD5341N  [ESD0402]  42.72 122.05 270 top
D2513  ESD5341N  [ESD0402]  120.75 89.31 270 top
D2514  ESD5341N  [ESD0402]  120.75 92.35 90 top
D2515  ESD5341N  [ESD0402]  120.75 94.89 270 top
D2516  ESD5341N  [ESD0402]  120.75 97.94 90 top
D5000  B5819WS  [SOD_323]  80.64 154.86 180 bottom
D5001  B5819W  [SOD_123]  80.64 156.58 180 bottom
D5100  B5819WS  [SOD_323]  100.94 153.29 0 bottom
D5101  B5819WS  [SOD_323]  100.68 154.71 0 bottom
D5102  B5819W  [SOD_123]  100.97 156.65 0 bottom
D5103  1N4148W  [SOD_123]  99.11 140.69 90 bottom
D5900  ESD5341N  [ESD0402]  27.55 158.55 180 top
D5901  ESD5341N  [ESD0402]  30.33 158.55 180 top
D5902  B5819WS  [SOD_323]  38.94 152.5 270 top
D5903  ESD5341N  [ESD0402]  33.12 158.55 180 top
D5904  ESD5341N  [ESD0402]  39.75 158.5 270 top
D5905  ESD5341N  [ESD0402]  42.29 158.5 270 top
D5906  ESD5341N  [ESD0402]  43.51 158.5 270 top
D5907  ESD5341N  [ESD0402]  41.07 158.49 270 top
D5908  B5819W  [SOD_123]  38.13 157.07 90 top
D5910  BAV99  [SOT_23]  26.85 154.94 0 top
D5911  BAV99  [SOT_23]  30.4 154.94 0 top
D5912  BAV99  [SOT_23]  33.86 154.94 0 top
D6701  -  [BA301N]  127.97 134.52 270 bottom
D6702  -  [BA301N]  135.86 134.39 270 bottom
D6703  -  [BA301N]  139.52 134.39 270 bottom
D6704  -  [BA301N]  147.37 134.32 270 bottom
D6705  BS3500NCF  [SMB_F]  127.97 134.11 270 bottom
D6706  BS3500NCF  [SMB_F]  135.86 134.09 270 bottom
D6707  BS3500NCF  [SMB_F]  139.52 134.09 270 bottom
D6708  BS3500NCF  [SMB_F]  147.37 134.11 270 bottom
D6801  -  [BA301N]  104.29 134.52 270 bottom
D6802  -  [BA301N]  112.52 134.42 270 bottom
D6803  -  [BA301N]  116.18 134.42 270 bottom
D6804  -  [BA301N]  124.31 134.42 270 bottom
D6805  BS3500NCF  [SMB_F]  104.29 134.21 270 bottom
D6806  BS3500NCF  [SMB_F]  112.52 134.11 270 bottom
D6807  BS3500NCF  [SMB_F]  116.18 134.11 270 bottom
D6808  BS3500NCF  [SMB_F]  124.31 134.11 270 bottom
D7000  ESD5451N  [ESD0402]  116.99 153.81 270 top
D7001  ESD5451N  [ESD0402]  120.85 154.1 180 top
D9100  ESD5451N  [ESD0402]  41.09 83.35 270 top
D9101  ESD5451N  [ESD0402]  41.13 86.36 90 top
D9102  ESD5341N  [ESD0402]  11.49 119.24 90 bottom
D9103  ESD5341N  [ESD0402]  11.49 116.36 270 bottom
ED5000  ESD5341N  [ESD0402]  79.18 156.64 270 top
ED5001  ESD5341N  [ESD0402]  78.06 156.64 270 top
ED5002  ESD5341N  [ESD0402]  76.95 156.64 270 top
ED5003  ESD5341N  [ESD0402]  75.83 156.64 270 top
ED5100  ESD5341N  [ESD0402]  103.34 156.64 270 top
ED5101  ESD5341N  [ESD0402]  102.22 156.64 270 top
ED5102  ESD5341N  [ESD0402]  101.11 156.64 270 top
ED5103  ESD5341N  [ESD0402]  99.99 156.64 270 top
ED6701  UDD32C03L01  [SOD_323]  142.14 121.74 180 top
ED6702  UDD32C03L01  [SOD_323]  138.33 121.74 180 top
ED6703  UDD32C03L01  [SOD_323]  134.52 121.74 180 top
ED6704  UDD32C03L01  [SOD_323]  130.71 121.74 180 top
ED6801  UDD32C03L01  [SOD_323]  111.2 121.74 0 top
ED6802  UDD32C03L01  [SOD_323]  115.01 121.74 0 top
ED6803  UDD32C03L01  [SOD_323]  118.82 121.74 0 top
ED6804  UDD32C03L01  [SOD_323]  122.63 121.74 0 top
ED9500  ESD5451N  [ESD0402]  161.13 14.74 270 top
ED9501  ESD5451N  [ESD0402]  161.13 17.72 90 top
ED9502  ESD5451N  [ESD0402]  31.38 8.92 0 top
ED9503  ESD5451N  [ESD0402]  28.22 8.92 180 top
ED9504  ESD5451N  [ESD0402]  19.4 8.92 0 top
ED9505  ESD5451N  [ESD0402]  22.08 8.92 0 top
F2000  JK-SMD200L  [F8050]  157.02 138.89 270 top
F2001  JK-nSMD035  [R1206]  159.28 26.96 0 top
FB2100  180R-100M  [L0603]  78.38 43.97 135 top
FB5900  26R-100M  [L0603]  31.18 150.3 90 top
FB5901  26R-100M  [L0603]  32.5 150.3 90 top
FB5902  26R-100M  [L0603]  33.82 150.3 90 top
FB5903  180R-100M  [L0603]  31.56 146.51 0 bottom
FB5904  120R-100MHz  [L0603]  48.45 157.59 0 top
FB5905  120R-100MHz  [L0603]  19.24 157.53 180 top
FB5906  180R-100M  [L0603]  29.54 138.9 270 bottom
FB6701  120R-100MHz  [L0603]  127.51 151.95 0 top
FB7000  180R-100M  [L0603]  120.25 146.2 0 top
FB9500  120R-100MHz  [L0603]  13.76 10.13 90 top
H9900  HOLE_3R20  [HOLE_C3R20_C6R00]  6.38 159.82 0 top
H9901  HOLE_3R20  [HOLE_C3R20_C6R00]  163.86 136.96 0 top
H9902  HOLE_3R20  [HOLE_C3R20_C6R00]  163.86 4.88 0 top
H9903  HOLE_3R20  [HOLE_C3R20_C6R00]  6.38 4.88 0 top
H9904  HOLE_3R20  [HOLE_C3R20_C6R00]  45.87 42.06 180 top
H9905  HOLE_3R20  [HOLE_C3R20_C6R00]  127.56 37.19 0 top
H9906  HOLE_3R20  [HOLE_C3R20_C6R00]  147.78 84.84 180 top
H9907  HOLE_3R20  [HOLE_C3R20_C6R00]  20.4 136.96 0 top
IR9000  IRM_3638  [IJ3_IRM_3638]  130.92 5.08 0 top
J2000  ATXPOWER_20_4R20_V  [CNN20F_4R20_V_H_DIP]  160.38 68.53 90 top
J2001  DC-0007-5P  [DC3_DC_0007_5P]  159.77 169.98 270 top
J2002  CN2M_2R54_V  [CN2M_2R54_V_P_DIP]  165.25 28.35 270 top
J2003  ATXPOWER_4_4R20_V  [CNN4F_4R20_V_H_DIP]  165.96 152.3 270 top
J2004  CON2M_1X2_2R54_V  [CN2M_2R54_V_DIP]  165.76 62.48 180 top
J2005  SATA_IDE_DIP_4Pin  [SATA-IDE4M_5R08_DIP]  163.78 39.01 180 top
J2200  CR1220-3V  [BAT_CR1220]  13.51 148.74 0 top
J2500  USB30_A_V  [USB30A9_25R70X7R32X13R85]  57.28 152.47 90 top
J2501  CN4M_2R54_V  [CN4M_2R54_V_P_DIP]  47.7 123.55 90 top
J2502  HEADER-05X2  [HDR_USB]  126.34 89.71 90 top
J2503  USB-AF-06-003  [USB20A4_UA04-DHF-PW137]  45.77 123.55 90 top
J5000  HDMI_TYPE_A  [HDMIA19_HDMI_01A]  69.43 160.92 0 top
J5100  HDMI_TYPE_A  [HDMIA19_HDMI_01A]  93.59 160.92 0 top
J5200  -  [CNN30_1R00_FP05SL_V]  71.9 125.65 0 top
J5900  VGA_DB15  [DSUB15B]  29.2 163.92 0 top
J6700  RJSAE5F8002  [RJ45_SAE5F8002]  135.03 148.75 180 top
J7001  -  [PJ3_RCA_2X1]  120 160.73 0 top
J8300  -  [SATA30_7P_V_DIP]  116.45 17.7 0 top
J8301  -  [SATA30_7P_V_DIP]  116.45 5 0 top
J8302  -  [SATA30_7P_V_DIP]  94.86 5 0 top
J8303  -  [SATA30_7P_V_DIP]  73.27 5 0 top
J8304  -  [SATA30_7P_V_DIP]  51.68 5 0 top
J8305  -  [SATA30_7P_V_DIP]  51.68 17.7 0 top
J8500  Mini_PCIe_Slot_2xSMTS02046CTJ  [MINI_PCIE_SLOT]  19.71 62.75 180 top
J8501  Mini_PCIe_Slot_2xSMTS02046CTJ  [MINI_PCIE_SLOT]  19.71 81.18 0 top
J9000  CN3M_2R54_V  [CN3M_2R54_V_DIP]  128.43 8.73 0 top
J9001  P101-2x5SGF01  [CNN10M_2R54_V_DIP]  145.25 17.09 0 top
J9100  CON4M_1X4_2R54_V  [CN4M_2R54_V_DIP]  38.5 80.92 90 top
J9101  USB20_mini  [USB20MIN5_USB_M5_03_002]  5.88 117.85 0 bottom
J9500  CN4M_2R54_V  [CN4M_2R54_V_P_DIP]  165.12 16 270 top
J9501  CN4M_2R54_V  [CN4M_2R54_V_P_DIP]  17.72 5.49 180 top
J9502  CN3M_2R54_V  [CN3M_2R54_V_P_DIP]  31.38 5.49 180 top
J9900  Radiator_38x38  [RADIATOR_38RX38RX10R]  84.58 78.44 0 top
L2000  4.7uH  [IND_606045]  147.98 66.34 270 top
L2001  6.8uH  [IND_606045]  148.08 116.23 270 top
L2100  2.2uH  [IND_404026]  124.92 62.08 180 top
L2101  1.0uH  [IND_404030]  86.51 110.54 270 top
L2102  1.0uH  [IND_404030]  77.98 110.64 270 top
L2103  0.24uH  [IND_252012]  75.88 55.09 90 top
L2500  NC  [RP2_0405]  50.11 149.17 270 top
L2501  NC  [RP2_0405]  41.05 120.76 270 top
L2502  NC  [RP2_0405]  118.88 90.88 180 top
L2503  NC  [RP2_0405]  119.02 96.42 180 top
L6700  2.2uH  [IND_303015]  134.67 100.1 0 top
L6800  2.2uH  [IND_303015]  121.79 106.88 90 top
L8300  2.2uH  [IND_404026]  58.78 44.88 0 top
L8301  2.2uH  [IND_404026]  58.78 34.72 0 top
L8500  4.7uH  [IND_606045]  40.73 55.34 180 top
LED2001  LED_GREEN  [LED0603]  154.23 104.65 270 top
LED2002  LED_RED  [LED0603]  154.23 98.15 270 top
LED9000  LED_BLUE  [LED0603]  141.83 2.58 180 top
LED9001  LED_GREEN  [LED0603]  154.53 2.58 180 top
LED9002  LED_GREEN  [LED0603]  148.18 2.58 180 top
LED9100  LED_RED  [LED0603]  3.08 111.51 270 top
M9900  -  [MARK]  39.47 25.81 180 bottom
M9901  -  [MARK]  3.91 166.42 180 bottom
M9902  -  [MARK]  155.3 19.51 180 bottom
M9903  -  [MARK]  158.98 8.59 0 top
M9904  -  [MARK]  3.91 166.42 0 top
M9905  -  [MARK]  2.51 2.69 0 top
NOREF  -  []  97.49 37.8 0 top
NOREF#2  -  []  127.56 20.12 0 top
NOREF#3  -  []  130.3 49.07 0 top
Q2100  WPM3407-3/TR  [SOT_23]  141.88 49.16 90 top
Q2101  S8050  [SOT_23]  142.14 45.63 270 top
Q5000  2SK3018  [SOT_323]  79.52 152.05 0 top
Q5001  2SK3018  [SOT_323]  82.02 152.05 0 top
Q5002  2SK3018  [SOT_323]  76.97 152.09 0 top
Q5200  WPM3407-3/TR  [SOT_23]  73.5 118.82 0 top
Q5201  S8050  [SOT_23]  80.26 118.98 90 top
Q7000  S8050  [SOT_23]  135.46 27.91 270 top
Q9000  S8050  [SOT_23]  140.76 9.7 180 top
Q9001  S8050  [SOT_23]  153.46 9.7 180 top
Q9002  S8050  [SOT_23]  147.11 9.7 180 top
Q9500  S8050  [SOT_23]  15.94 34.74 180 top
Q9501  S8050  [SOT_23]  37.64 45.45 90 top
Q9502  WPM3407-3/TR  [SOT_23]  32.9 50.35 0 top
R1100  120R  [R0201]  91.89 78.64 270 bottom
R1200  22R  [R0402]  67.21 76.2 90 top
R1201  0R  [R0402]  67.66 80.18 180 top
R1202  1M  [R0402]  67.21 78.23 90 top
R1203  10K  [R0402]  61.13 83.34 270 top
R1204  22R  [R0402]  60.78 81.82 180 top
R1205  0R  [R0402]  71.84 88 135 bottom
R1206  0R  [R0402]  77.77 95.4 90 top
R1207  2.2K  [R0402]  68.91 81.67 315 bottom
R1208  2.2K  [R0402]  69.58 82.34 315 bottom
R1209  2.2K  [R0402]  67.59 82.63 315 top
R1210  2.2K  [R0402]  64.97 85.34 135 top
R1310  22R  [R0402]  87.73 62.28 270 top
R1311  22R  [R0402]  88.12 64.47 270 top
R1400  0R  [R0402]  81.59 74.99 315 bottom
R1401  0R  [R0402]  93.19 90.6 45 bottom
R1402  0R  [R0402]  76.96 73.05 225 bottom
R1403  0R  [R0402]  87.16 89 90 bottom
R1406  200R  [R0201]  81.99 77.68 315 bottom
R1407  0R  [R0402]  64.47 74.17 270 top
R1408  0R  [R0402]  62.94 74.62 180 top
R1410  0R  [R0402]  76.25 73.66 225 bottom
R1500  10K  [R0402]  84.79 60.44 270 top
R1501  100R  [R0402]  107.12 47.24 90 top
R1502  0R  [R0402]  81.53 87.83 135 bottom
R1508  22R  [R0402]  82.85 62.89 225 top
R1509  22R  [R0402]  82.14 63.6 225 top
R1510  22R  [R0402]  81.43 64.31 225 top
R1511  22R  [R0402]  76.96 61.67 225 top
R1512  22R  [R0402]  76.25 62.38 225 top
R1513  22R  [R0402]  75.54 63.09 225 top
R1515  22R  [R0402]  81.33 61.16 225 top
R1516  0R  [R0402]  80.52 61.98 225 top
R1641  22R  [R0402]  94.44 96.01 45 top
R1643  22R  [R0402]  93.22 97.33 45 top
R1645  22R  [R0402]  91.34 96.06 45 top
R1650  22R  [R0402]  90.17 90.83 90 top
R1652  22R  [R0402]  90.17 92.76 90 top
R1654  22R  [R0402]  91.19 91.24 90 top
R1660  22R  [R0402]  93.42 93.07 45 top
R1667  0R  [R0402]  92.81 89.71 45 top
R1704  2.2R  [R0402]  69.14 85.65 135 top
R1705  2.2R  [R0402]  71.17 84.53 135 top
R1706  2.2R  [R0402]  71.88 85.24 135 top
R1707  2.2R  [R0402]  71.48 87.88 135 top
R1708  2.2R  [R0402]  68.43 84.94 135 top
R1709  2.2R  [R0402]  70.76 87.17 135 top
R1710  2.2R  [R0402]  73.41 86.46 135 top
R1711  2.2R  [R0402]  74.07 87.12 135 top
R1713  1.62K  [R0201]  79.11 80.46 90 bottom
R1803  0R  [R0402]  88.95 93.88 45 top
R1813  22R  [R0402]  83.16 93.37 90 top
R1901  0R  [R0402]  91.19 63.4 315 top
R1902  0R  [R0402]  92.71 61.87 315 top
R1904  0R  [R0402]  90.58 61.67 315 top
R1905  2.2K  [R0402]  103.89 151.41 180 bottom
R1906  2.2K  [R0402]  103.89 150.49 180 bottom
R2001  2R  [R1210]  153.47 162.26 90 top
R2004  100K  [R0402]  155.71 72.74 0 top
R2005  232K  [R0402]  155.5 64.21 0 top
R2006  24K  [R0402]  155.71 71.75 0 top
R2007  49.9K  [R0402]  155.5 65.23 180 top
R2009  100K  [R0402]  157.23 122.12 180 top
R2010  232K  [R0402]  157.23 117.65 0 top
R2011  24K  [R0402]  157.23 121.11 0 top
R2012  30K  [R0402]  157.23 118.67 180 top
R2016  0R  [R1206]  152.35 59.74 0 top
R2017  0R  [R1206]  159.26 113.79 0 top
R2018  0R  [R1206]  164.44 54.56 270 top
R2019  0R  [R1206]  151.23 54.76 180 top
R2020  10K  [R0402]  154.23 107.9 270 top
R2021  10K  [R0402]  154.23 101.4 270 top
R2100  56K  [R0402]  54.12 63.61 270 top
R2101  10K  [R0402]  47.43 65.3 270 top
R2102  100K  [R0402]  125.83 68.88 270 top
R2103  100K  [R0402]  126.72 68.88 270 top
R2104  390K  [R0402]  51.56 62.79 180 top
R2105  100K  [R0402]  128.88 68.88 90 top
R2106  10K  [R0402]  82.85 115.14 270 bottom
R2107  100R  [R0402]  79.54 110.92 270 bottom
R2108  10K  [R0402]  74.31 115.11 270 bottom
R2109  100R  [R0402]  72.15 111 90 bottom
R2110  18K  [R0402]  79.35 112.6 180 bottom
R2111  51K  [R0402]  81.38 112.6 0 bottom
R2112  10K  [R0402]  70.81 112.7 180 bottom
R2113  51K  [R0402]  72.85 112.7 0 bottom
R2114  18K  [R0402]  79.35 113.59 0 bottom
R2115  300K  [R0402]  81.38 115.64 0 bottom
R2116  27K  [R0402]  70.81 113.7 0 bottom
R2117  150K  [R0402]  72.85 115.74 0 bottom
R2118  10K  [R0402]  79.35 114.56 180 bottom
R2119  100K  [R0402]  81.38 114.56 180 bottom
R2120  10K  [R0402]  70.81 114.66 180 bottom
R2121  100K  [R0402]  72.85 114.66 180 bottom
R2122  10K  [R0402]  70.6 53.43 0 top
R2123  100K  [R0402]  145.55 49.09 270 top
R2124  100R  [R0402]  70.6 54.5 180 top
R2125  10K  [R0402]  144.55 47.02 270 top
R2126  10K  [R0402]  138.85 44.5 0 top
R2127  51K  [R0402]  138.85 45.42 180 top
R2128  100K  [R0402]  122.38 54.25 180 top
R2129  DNP  [R0402]  116.57 54.75 90 top
R2130  100K  [R0402]  82.77 42.79 315 top
R2131  DNP  [R0402]  76.95 49.38 45 top
R2132  DNP  [R0402]  118.63 54.75 270 top
R2133  DNP  [R0402]  78.34 47.99 225 top
R2135  0R  [R0603]  80.21 106.78 180 top
R2136  0R  [R0603]  142.44 50.1 180 top
R2202  10K  [R0402]  49.74 76.44 180 top
R2203  56K  [R0402]  50.12 69.7 270 top
R2204  390K  [R0402]  48.05 69.7 270 top
R2205  0R  [R0402]  24.72 140.86 0 top
R2206  0R  [R0402]  24.72 142.06 0 top
R2300  0R  [R0402]  112.06 52.16 180 top
R2301  10K  [R0402]  62.82 85.74 315 top
R2302  0R  [R0402]  112.06 51.11 180 top
R2303  4.7K  [R0402]  61.32 87.21 135 top
R2304  10K  [R0402]  114.35 56.69 180 top
R2500  10K  [R0402]  57.5 140.93 90 top
R2501  15K  [R0402]  56.48 140.93 90 top
R2502  2.2R  [R0402]  49.66 149.15 270 top
R2503  2.2R  [R0402]  50.67 149.15 270 top
R2505  0R  [R0402]  48.39 153.11 90 top
R2506  0R  [R0402]  49.4 153.11 90 top
R2508  0R  [R0805]  62.43 143.36 180 top
R2510  10K  [R0402]  58.51 140.93 270 top
R2511  DNP  [R0402]  65.79 139.42 0 top
R2512  4.7K  [R0402]  58.82 139.42 180 top
R2513  2.2R  [R0402]  40.59 120.76 270 top
R2514  0R  [R0805]  48.43 106.26 180 top
R2515  2.2R  [R0402]  41.5 120.76 270 top
R2516  10K  [R0402]  43.88 105.47 270 top
R2518  4.7K  [R0402]  44.41 104 180 top
R2523  0R  [R0805]  127.78 77.5 180 top
R2524  10K  [R0402]  123.64 77.02 270 top
R2525  4.7K  [R0402]  124.17 75.55 180 top
R2526  2.2R  [R0402]  118.88 91.39 180 top
R2527  2.2R  [R0402]  118.92 90.42 180 top
R2531  2.2R  [R0402]  119.02 96.93 180 top
R2532  2.2R  [R0402]  119.02 95.91 180 top
R2533  0R  [R0603]  120.04 100.08 180 top
R3300  49.9R  [R0201]  102.01 77.11 180 bottom
R3301  49.9R  [R0201]  102.01 76.5 180 bottom
R3302  22R  [R0201]  103.38 77.11 180 bottom
R3303  22R  [R0201]  103.38 77.11 0 top
R3304  22R  [R0201]  103.38 76.5 180 bottom
R3305  22R  [R0201]  103.38 76.5 0 top
R3306  0R  [R0201]  106.73 77.52 270 top
R3307  0R  [R0201]  106.73 76.4 270 top
R3308  0R  [R0201]  109.58 78.44 180 top
R3309  0R  [R0201]  109.58 77.83 0 top
R3310  0R  [R0201]  106.63 76.4 270 bottom
R3311  0R  [R0201]  106.63 75.29 270 bottom
R3312  240R  [R0402]  104.4 71.33 90 bottom
R3313  240R  [R0402]  104.27 90.96 90 bottom
R3314  0R  [R0402]  114.96 68.68 135 top
R3315  0R  [R0402]  114.45 87.48 0 top
R3316  0R  [R0402]  102.67 70.23 270 bottom
R3317  0R  [R0402]  103.37 90.93 90 bottom
R3318  0R  [R0402]  108.66 68.28 180 bottom
R3319  0R  [R0402]  108.42 88.09 180 bottom
R3320  0R  [R0402]  109.47 77.93 90 bottom
R3321  1K  [R0402]  109.89 91.6 90 bottom
R3322  0R  [R0402]  108.37 92.05 180 bottom
R3323  1K  [R0402]  110.87 91.6 270 bottom
R3325  10K  [R0402]  130 71.93 180 top
R4000  0R  [R0402]  94.64 50.01 0 bottom
R4002  0R  [R0402]  99.94 54.32 270 bottom
R4003  10K  [R0402]  94.72 52.84 180 bottom
R4004  10K  [R0402]  98.48 50.51 90 bottom
R4005  10K  [R0402]  100.41 52.9 180 bottom
R4006  47K  [R0402]  96.75 50.01 180 bottom
R4311  10K  [R0402]  100.87 54.32 90 bottom
R4312  10K  [R0402]  105.52 46.79 90 bottom
R5000  10K  [R0402]  79.52 149.83 0 top
R5001  1.8K  [R0402]  79.52 154.2 180 top
R5002  10K  [R0402]  82.02 149.83 0 top
R5003  1.8K  [R0402]  81.57 154.2 0 top
R5004  0R  [R0402]  80.64 156.58 180 bottom
R5005  1K  [R0402]  81.39 156.67 90 top
R5006  27K  [R0402]  77 149.83 0 top
R5008  100K  [R0402]  80.38 156.67 270 top
R5100  2.2R  [R0402]  93.64 152.32 90 top
R5101  2.2R  [R0402]  94.55 152.32 90 top
R5102  2.2R  [R0402]  95.14 154.25 90 top
R5103  2.2R  [R0402]  96.05 154.25 90 top
R5104  2.2R  [R0402]  96.64 152.32 90 top
R5105  0R  [R0402]  85.6 142.98 180 top
R5106  2.2R  [R0402]  97.55 152.32 90 top
R5107  0R  [R0402]  86.49 143.89 90 bottom
R5108  2.2R  [R0402]  98.14 154.25 90 top
R5109  27K  [R0402]  101 154.25 90 top
R5110  2.2R  [R0402]  99.05 154.25 90 top
R5111  0R  [R0402]  103.78 146.3 0 bottom
R5112  0R  [R0402]  85.6 143.89 180 top
R5113  22R  [R0402]  101 152.28 90 top
R5114  0R  [R0402]  85.6 144.86 180 top
R5115  0R  [R0402]  104.9 148.31 0 bottom
R5116  1K  [R0402]  104.05 152.28 90 top
R5117  0R  [R0402]  104.9 147.35 0 bottom
R5118  100K  [R0402]  104.05 154.25 90 top
R5119  2K  [R0402]  88.11 147.04 180 top
R5120  1.8K  [R0402]  102.07 154.25 270 top
R5121  1.8K  [R0402]  103.14 154.25 270 top
R5122  22R  [R0402]  102.07 152.28 90 top
R5123  22R  [R0402]  103.09 152.28 90 top
R5124  0R  [R0402]  100.97 156.65 0 bottom
R5125  10K  [R0402]  74.65 144.31 90 top
R5126  10K  [R0402]  74.75 139.43 270 top
R5201  100K  [R0402]  76.76 119.42 90 top
R5202  10K  [R0402]  77.77 119.42 270 top
R5203  10K  [R0402]  83.77 118.92 270 top
R5204  51K  [R0402]  82.75 118.92 90 top
R5205  0R  [R0402]  63.14 119.83 270 top
R5206  0R  [R0402]  64.06 119.83 90 top
R5207  0R  [R0402]  64.77 121.86 90 top
R5208  0R  [R0402]  65.68 121.86 270 top
R5209  0R  [R0402]  66.4 119.83 270 top
R5210  0R  [R0402]  67.31 119.83 90 top
R5211  0R  [R0402]  68.02 121.86 90 top
R5212  0R  [R0402]  68.94 121.86 270 top
R5213  0R  [R0402]  69.65 119.83 270 top
R5214  0R  [R0402]  70.56 119.83 90 top
R5219  0R  [R0402]  59.07 114.04 0 bottom
R5220  0R  [R0402]  59.07 115.03 180 bottom
R5900  4.7K  [R0402]  28.91 141.93 0 top
R5901  4.7K  [R0402]  28.91 140.86 0 top
R5902  4.7K  [R0402]  28.91 142.93 0 top
R5903  0R  [R0402]  26.67 142.06 0 top
R5904  0R  [R0402]  26.67 140.86 0 top
R5905  75R  [R0402]  31.18 147.51 90 top
R5906  0R  [R0402]  29.08 137.94 0 top
R5907  100K  [R0402]  29.08 136.88 0 top
R5908  75R  [R0402]  32.5 147.51 90 top
R5909  75R  [R0402]  33.82 147.51 90 top
R5910  4.7K  [R0402]  38.27 137.93 180 top
R5911  2.2K  [R0402]  43.31 154.03 90 top
R5912  2.2K  [R0402]  42.16 154.03 90 top
R5913  47R  [R0402]  35.32 145.56 90 top
R5914  47R  [R0402]  38.27 143.19 0 top
R5915  47R  [R0402]  38.27 142.19 0 top
R5916  4.7K  [R0402]  38.27 138.95 0 top
R5917  0R  [R0402]  37.62 151.79 90 top
R5918  47R  [R0402]  36.49 145.54 90 top
R5919  0R  [R0402]  38.02 139.5 90 bottom
R6700  0R  [R0402]  130.25 120.04 90 top
R6701  0R  [R0402]  129.2 105.87 90 bottom
R6702  0R  [R0402]  134.06 120.04 90 top
R6703  0R  [R0402]  134.98 120.04 90 top
R6704  0R  [R0402]  131.17 120.04 90 top
R6705  0R  [R0402]  137.87 120.04 90 top
R6706  0R  [R0402]  138.79 120.04 90 top
R6707  0R  [R0402]  141.68 120.04 90 top
R6708  0R  [R0402]  131.38 109.21 0 bottom
R6709  0R  [R0402]  142.6 120.04 90 top
R6710  100R  [R0402]  133.34 104.05 0 bottom
R6711  120R  [R0402]  131.36 104.05 180 bottom
R6717  4.7K  [R0402]  135.7 105.37 0 top
